# Altium PCB 中板20201119.PCBDOC
Units mm, origin at the board's own origin, x right, y up, seen from the top; angles counter-clockwise.
Board outline 146 x 56 mm, 2 copper layers (Top Layer, Bottom Layer); 4 components, 41 nets, 122 pads, 0 vias.
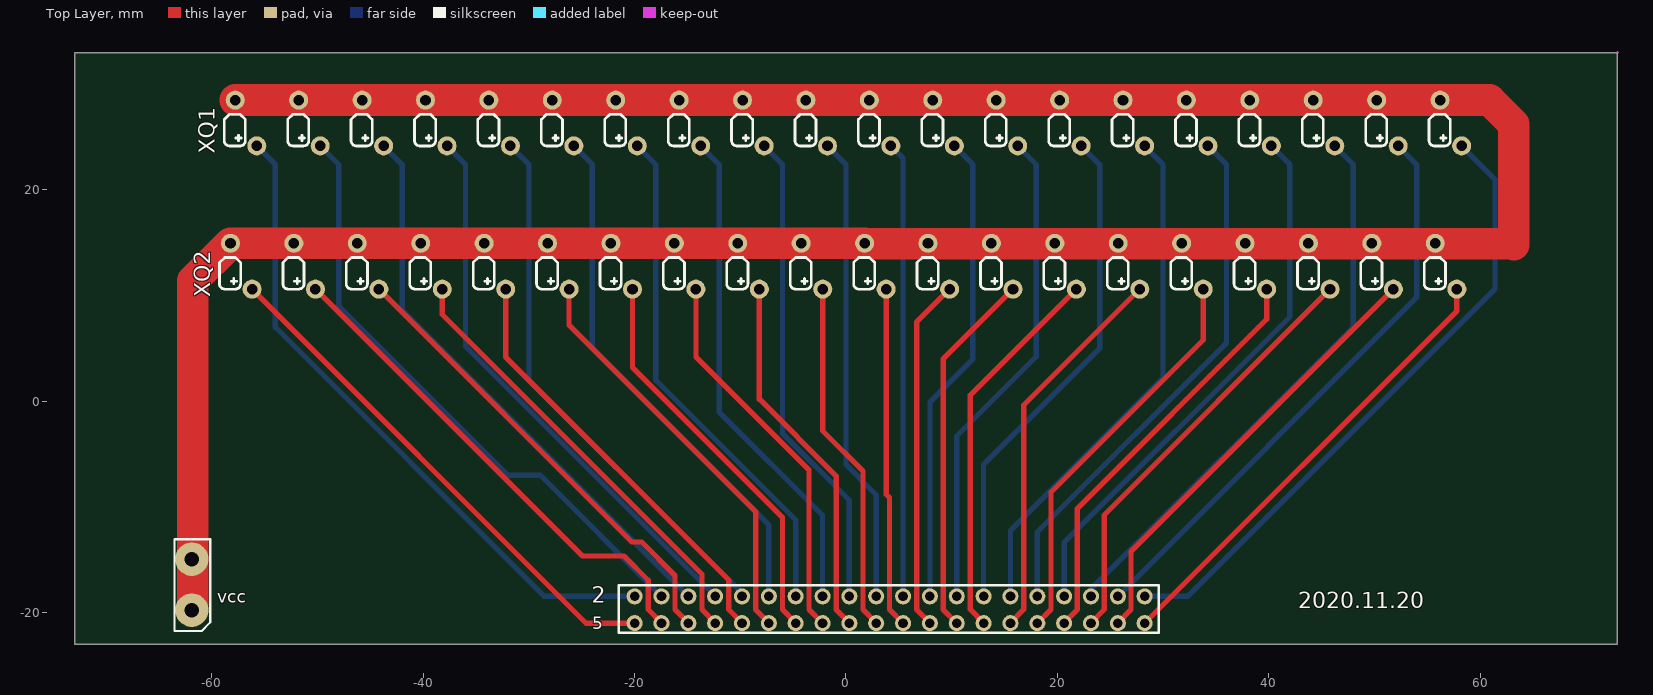
[diagram p0: Top Layer view]
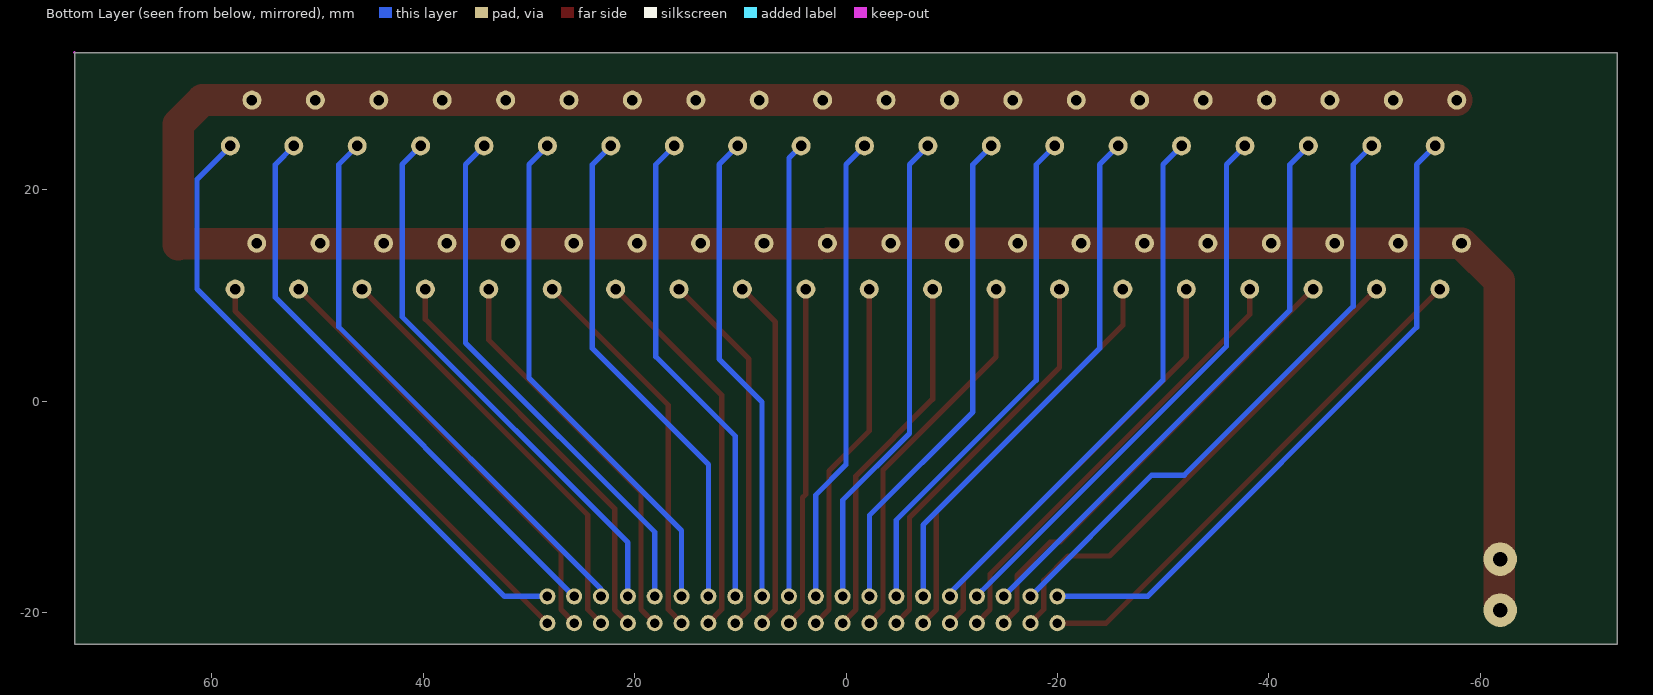
[diagram p1: Bottom Layer view, seen from below]

## Layer stack, top to bottom
Top Solder: solder mask 0.0102, Solder Resist, Dk 3.5
Top Layer: signal copper 0.0356
Dielectric1: dielectric 0.32, FR-4, Dk 4.8
Bottom Layer: signal copper 0.0356
Bottom Solder: solder mask 0.0102, Solder Resist, Dk 3.5

## Board outline
-73,-23 -73,32.975 73,32.975 73,33 73,-23

## Design rules (kind name [scope] priority, off if disabled: settings)
Clearance [All] p1: gap=0.3 ignorepadtopadclearanceinfootprint=FALSE except(0: Arc-Hole Track-Hole SMDPad-Hole THPad-Hole Via-Hole Fill-Hole Poly-Hole Region-Hole Text-Hole)
DiffPairsRouting [All] p1: maxlimit=0.254 minlimit=0.254 mostfreqgap=0.254 toplayer_minwidth=0.381 toplayer_maxwidth=4 toplayer_prefwidth=0.381 bottomlayer_minwidth=0.381 bottomlayer_maxwidth=4 bottomlayer_prefwidth=0.381 maxuncoupledlength=12.7
FabricationTestPointUsage TestPointUsage [All] p1: valid=0 allowmultiple=FALSE
FabricationTestpoint Testpoint [All] p1: side=3 testpointundercomponent=TRUE minsize=1.016 maxsize=2.54 preferedsize=1.524 minholesize=0 maxholesize=1.016 preferedholesize=0.813 testpointgrid=0.025 allowsidetop=TRUE allowsidebottom=TRUE usegrid=TRUE gridtolerance=0
PolygonConnect [All] p1: connectstyle=Relief reliefconductorwidth=0.254 reliefentries=4 polygonreliefangle="90 Angle" airgapwidth=0.254
RoutingVias [All] p1: holewidth=0.8 width=1.6 viastyle="Through Hole" minholewidth=0.711 minwidth=1.27 maxholewidth=0.711 maxwidth=1.27
SilkToSolderMaskClearance SilkscreenOverComponentPads [IsPad] p1: minsilkscreentomaskgap=0.254 clearancetoexposedcopper=TRUE
SolderMaskExpansion [All] p1: expansion=0.102
Width [All] p1: maxlimit=2.54 minlimit=0.254 preferedwidth=0.381
26 further rules are at their usual default settings.

## Classes and differential pairs
component class 盲文原理图1: 2 XQ1 XQ2

## Components (designator, comment, footprint, x,y, rotation, side; value= is the part's Value field where it differs from the comment)
2 "Header 21X2" XinPian -20,-21 r180 top (schematic designator 1)
XQ1 "Header 20X2" XIANQUAN1 58.25,24.16 r180 top
XQ2 "Header 20X2" XIANQUAN1 57.799,10.61 r180 top
? "" N1A -61.904,-14.939 r180 top

## Footprints (in the part's own frame and the unit in brackets; to place one, negate y for a bottom-side part, rotate by r counter-clockwise, add the part's x,y. Pads: shape width x height; smd on the part's side, far side on the other; paste and mask are expansions set on the pad)
N1A [mil]
  round 125 hole 55: 1(0,0) 2(0,190)
  silkscreen extent -69,-74 65,268
XIANQUAN1 [mm]
  round 1.8 hole 1: 1(2.04,-4.34) 2(0,0) 3(8.04,-4.34) 4(6,0) 5(14.04,-4.34) 6(12,0) 7(20.04,-4.34) 8(18,0) 9(26.04,-4.34) 10(24,0) 11(32.04,-4.34) 12(30,0) 13(38.04,-4.34) 14(36,0) 15(44.04,-4.34) 16(42,0) 17(50.04,-4.34) 18(48,0) 19(56.04,-4.34) 20(54,0) 21(62.04,-4.34) 22(60,0) 23(68.04,-4.34) 24(66,0) 25(74.04,-4.34) 26(72,0) 27(80.04,-4.34) 28(78,0) 29(86.04,-4.34) 30(84,0) 31(92.04,-4.34) 32(90,0) 33(98.04,-4.34) 34(96,0) 35(104.04,-4.34) 36(102,0) 37(110.04,-4.34) 38(108,0) 39(116.04,-4.34) 40(114,0)
  silkscreen extent 1.08,-3 117.08,0
XinPian [mil]
  round 60 hole 36: 1(0,-100) 2(-100,-100) 3(-200,-100) 4(-300,-100) 5(-400,-100) 6(-500,-100) 7(-600,-100) 8(-700,-100) 9(-800,-100) 10(-900,-100) 11(-1000,-100) 12(-1100,-100) 13(-1200,-100) 14(-1300,-100) 15(-1400,-100) 16(-1500,-100) 17(-1600,-100) 18(-1700,-100) 19(-1800,-100) 20(-1900,-100) 21(-1900,0) 22(-1800,0) 23(-1700,0) 24(-1600,0) 25(-1500,0) 26(-1400,0) 27(-1300,0) 28(-1200,0) 29(-1100,0) 30(-1000,0) 31(-900,0) 32(-800,0) 33(-700,0) 34(-600,0) 35(-500,0) 36(-400,0) 37(-300,0) 38(-200,0) 39(-100,0) 40(0,0)
  silkscreen extent -1953,-142 59,35

## Part data
2: library part "Header 22X2", "Header, 22-Pin, Dual row"
XQ1 XQ2: "Header, 20-Pin, Dual row"

## Nets (pads, with @x,y where several pads share a name; then routed paths per layer and width w, separated by ;. In a path a pad name is that pad's centre, name@x,y a point inside that pad or via, vN(x,y) a via of type N, cw(c..) or ccw(c..) an arc to the next point about the centre after c; other vN are vias at no path point)
GND: ?.1 ?.2 XQ1.1 XQ1.3 XQ1.5 XQ1.7 XQ1.9 XQ1.11 XQ1.13 XQ1.15 XQ1.17 XQ1.19 XQ1.21 XQ1.23 XQ1.25 XQ1.27 XQ1.29 XQ1.31 XQ1.33 XQ1.35 XQ1.37 XQ1.39 XQ2.1 XQ2.3 XQ2.5 XQ2.7 XQ2.9 XQ2.11 XQ2.13 XQ2.15 XQ2.17 XQ2.19 XQ2.21 XQ2.23 XQ2.25 XQ2.27 XQ2.29 XQ2.31 XQ2.33 XQ2.35 XQ2.37 XQ2.39 | length 291.3
  Top Layer w1.27: ?.2@-61.935,-19.25 -61.8,-19.115 ?.2@-61.75,-19.065
  Top Layer w1.524: 63.095,14.9 63.195,14.8
  Top Layer w2.54: ?.2 -61.8,-19.66 ?.2@-61.8,-19.115 ; XQ2.19 2.402,14.95 XQ2.19@2.452,14.9
  Top Layer w3: ?.2@-61.8,-19.115 -61.8,11.391 XQ2.39 XQ2.37 XQ2.35 XQ2.33 XQ2.31 XQ2.29 XQ2.27 XQ2.25 XQ2.23 XQ2.21 XQ2.19 ; XQ1.39 60.895,28.5 63.195,26.2 63.195,14.8 ; XQ2.19@2.452,14.9 37.759,14.9 63.095,14.9
XQ1_1: 2.20 XQ1.2 | length 60
  Bottom Layer w0.5: 2.20 32.315,-18.46 61.41,10.635 61.41,21 XQ1.2
XQ1_2: 2.19 XQ1.4 | length 55.1
  Bottom Layer w0.5: 2.19 54,9.82 54,22.41 XQ1.4
XQ1_3: 2.18 XQ1.6 | length 53.6
  Bottom Layer w0.381: 2.18 2.18@23.18,-17.77
  Bottom Layer w0.5: 2.18@23.18,-17.77 48,7.05 48,22.41 XQ1.6
XQ1_4: 2.17 XQ1.8 | length 52.2
  Bottom Layer w0.5: 2.17 20.64,-13.36 42,8 42,22.41 XQ1.8
XQ1_5: 2.16 XQ1.10 | length 50.8
  Bottom Layer w0.5: 2.16 18.1,-12.375 36,5.525 36,22.41 XQ1.10
XQ1_6: 2.15 XQ1.12 | length 49.3
  Bottom Layer w0.5: 2.15 15.56,-12.24 30,2.2 30,22.41 XQ1.12
XQ1_7: 2.14 XQ1.14 | length 47.9
  Bottom Layer w0.5: 2.14 13.02,-5.98 24,5 24,22.41 XQ1.14
XQ1_8: 2.13 XQ1.16 | length 46.5
  Bottom Layer w0.5: 2.13 10.48,-3.295 18,4.225 18,22.41 XQ1.16
XQ1_9: 2.12 XQ1.18 | length 45
  Bottom Layer w0.5: 2.12 7.94,-0.06 12,4 12,22.41 XQ1.18
XQ1_10: 2.11 XQ1.20 | length 43.1
  Bottom Layer w0.5: XQ1.20 5.4,23.01 2.11
XQ1_11: 2.10 XQ1.22 | length 44.5
  Bottom Layer w0.5: XQ1.22 0,22.41 0,-6 2.86,-8.86 2.10
XQ1_12: 2.9 XQ1.24 | length 46
  Bottom Layer w0.5: XQ1.24 -6,22.41 -6,-3.05 0.32,-9.37 2.9
XQ1_13: 2.8 XQ1.26 | length 47.4
  Bottom Layer w0.5: XQ1.26 -12,22.41 -12,-1 -2.22,-10.78 2.8
XQ1_14: 2.7 XQ1.28 | length 48.8
  Bottom Layer w0.5: XQ1.28 -18,22.41 -18,2 -4.76,-11.24 2.7
XQ1_15: 2.6 XQ1.30 | length 50.3
  Bottom Layer w0.5: XQ1.30 -24,22.41 -24,5 -7.3,-11.7 2.6
XQ1_16: 2.5 XQ1.32 | length 51.7
  Bottom Layer w0.381: 2.5 2.5@-9.84,-18.16
  Bottom Layer w0.5: XQ1.32 -30,22.41 -30,2 2.5@-9.84,-18.16
XQ1_17: 2.4 XQ1.34 | length 53.3
  Bottom Layer w0.381: 2.4@-12.85,-17.941 -12.85,-18.333 -12.722,-18.46 2.4
  Bottom Layer w0.5: XQ1.34 -36,22.41 -36,5.209 2.4@-12.85,-17.941
XQ1_18: 2.3 XQ1.36 | length 54.6
  Bottom Layer w0.5: XQ1.36 -42,22.41 -42,8.62 2.3
XQ1_19: 2.2 XQ1.38 | length 57.8
  Bottom Layer w0.5: XQ1.38 -48,22.41 -48,9 -32,-7 -28.92,-7 2.2
XQ1_20: 2.1 XQ1.40 | length 62.4
  Bottom Layer w0.5: XQ1.40 -54,22.41 -54,7 -28.54,-18.46 2.1
XQ2_1: 2.21 XQ2.2 | length 43.8
  Top Layer w0.5: 2.21 57.799,8.539 XQ2.2
XQ2_2: 2.22 XQ2.4 | length 42.4
  Top Layer w0.381: 2.22 2.22@25.72,-20.965
  Top Layer w0.5: 2.22@25.72,-20.965 26.972,-19.713 26.972,-14.217 XQ2.4
XQ2_3: 2.23 XQ2.6 | length 41
  Top Layer w0.381: 2.23 2.23@23.18,-20.965
  Top Layer w0.5: 2.23@23.18,-20.965 24.432,-19.713 24.432,-10.757 XQ2.6
XQ2_4: 2.24 XQ2.8 | length 39.5
  Top Layer w0.381: 2.24 2.24@20.64,-20.965
  Top Layer w0.5: 2.24@20.64,-20.965 21.892,-19.713 21.892,-10.15 39.799,7.757 XQ2.8
XQ2_5: 2.25 XQ2.10 | length 38.1
  Top Layer w0.5: 2.25 19.387,-19.713 19.387,-8.612 33.799,5.799 XQ2.10
XQ2_6: 2.26 XQ2.12 | length 36.7
  Top Layer w0.381: 2.26 2.26@15.56,-20.965
  Top Layer w0.5: 2.26@15.56,-20.965 16.812,-19.713 16.812,-0.377 XQ2.12
XQ2_7: 2.27 XQ2.14 | length 36.3
  Top Layer w0.381: 2.27 2.27@13.02,-20.965
  Top Layer w0.5: 2.27@13.02,-20.965 11.767,-19.713 11.767,0.578 XQ2.14
XQ2_8: 2.28 XQ2.16 | length 34.9
  Top Layer w0.5: 2.28 9.192,-19.713 9.192,4.003 XQ2.16
XQ2_9: 2.29 XQ2.18 | length 33.4
  Top Layer w0.381: 2.29 2.29@7.94,-20.965
  Top Layer w0.5: 2.29@7.94,-20.965 6.687,-19.713 6.687,7.498 XQ2.18
XQ2_10: 2.30 XQ2.20 | length 32.3
  Top Layer w0.5: XQ2.20 3.799,-8.799 4.112,-9.112 4.112,-19.713 2.30
XQ2_11: 2.31 XQ2.22 | length 33.7
  Top Layer w0.381: 2.31 2.31@2.86,-20.965
  Top Layer w0.5: XQ2.22 -2.201,-2.799 1.607,-6.608 1.607,-19.713 2.31@2.86,-20.965
XQ2_12: 2.32 XQ2.24 | length 35.1
  Top Layer w0.381: 2.32 2.32@0.32,-20.965
  Top Layer w0.5: XQ2.24 -8.201,0.201 -0.933,-7.068 -0.933,-19.713 2.32@0.32,-20.965
XQ2_13: 2.33 XQ2.26 | length 36.6
  Top Layer w0.5: XQ2.26 -14.201,4.201 -3.508,-6.492 -3.508,-19.713 2.33
XQ2_14: 2.34 XQ2.28 | length 38
  Top Layer w0.381: 2.34 2.34@-4.76,-20.965
  Top Layer w0.5: XQ2.28 -20.201,3.201 -6.013,-10.988 -6.013,-19.713 2.34@-4.76,-20.965
XQ2_15: 2.35 XQ2.30 | length 39.4
  Top Layer w0.381: 2.35 2.35@-7.3,-20.965
  Top Layer w0.5: XQ2.30 -26.201,7.201 -8.553,-10.448 -8.553,-19.713 2.35@-7.3,-20.965
XQ2_16: 2.36 XQ2.32 | length 40.9
  Top Layer w0.381: 2.36 2.36@-9.84,-20.965
  Top Layer w0.5: XQ2.32 -32.201,4.201 -11.093,-16.907 -11.093,-19.713 2.36@-9.84,-20.965
XQ2_17: 2.37 XQ2.34 | length 42.3
  Top Layer w0.381: 2.37 2.37@-12.38,-20.965
  Top Layer w0.5: XQ2.34 -38.201,8.201 -13.633,-16.368 -13.633,-19.713 2.37@-12.38,-20.965
XQ2_18: 2.38 XQ2.36 | length 44.3
  Top Layer w0.381: 2.38 2.38@-14.92,-20.965
  Top Layer w0.5: XQ2.36 -20.272,-13.319 -19.331,-13.319 -16.173,-16.477 -16.173,-19.713 2.38@-14.92,-20.965
XQ2_19: 2.39 XQ2.38 | length 47.5
  Top Layer w0.381: 2.39 2.39@-17.46,-20.965
  Top Layer w0.5: XQ2.38 -24.941,-14.65 -21,-14.65 -18.713,-16.937 -18.713,-19.713 2.39@-17.46,-20.965
XQ2_20: 2.40 XQ2.40 | length 49.3
  Top Layer w0.5: XQ2.40 -24.591,-21 2.40

## Keep-outs
Keep-Out Layer:
  lines w0.254: 73,33 73,33

## Silkscreen, mask and mechanical layers (free items; w line width, h text height)
Top Overlay:
  text "vcc" at -59.475,-19.475 h2.02
  text "2020.11.20" at 42.8,-19.6 h1.52
  text "5" at -24,-22 h2.02
Mechanical 1:
  circle w0.254: c24,0 r1.5
  circle w0.254: c-24,0 r1.5
  circle w0.254: c67.5,25 r1.5
  circle w0.254: c67.5,19.5 r1.5
  circle w0.254: c67.5,14 r1.5
  circle w0.254: c-67.5,14 r1.5
  circle w0.254: c-67.5,19.5 r1.5
  circle w0.254: c-67.5,25 r1.5
  circle w0.01: c-55.75,19.5 r0.5
  circle w0.01: c-55.75,17 r0.65
  circle w0.01: c-49.75,19.5 r0.5
  circle w0.01: c-49.75,17 r0.65
  circle w0.01: c-52.25,19.5 r0.5
  circle w0.01: c-52.25,22 r0.65
  circle w0.01: c-43.75,19.5 r0.5
  circle w0.01: c-43.75,17 r0.65
  circle w0.01: c-46.25,19.5 r0.5
  circle w0.01: c-46.25,22 r0.65
  circle w0.01: c-37.75,19.5 r0.5
  circle w0.01: c-37.75,17 r0.65
  circle w0.01: c-40.25,19.5 r0.5
  circle w0.01: c-40.25,22 r0.65
  circle w0.01: c-31.75,19.5 r0.5
  circle w0.01: c-31.75,17 r0.65
  circle w0.01: c-34.25,19.5 r0.5
  circle w0.01: c-34.25,22 r0.65
  circle w0.01: c-25.75,19.5 r0.5
  circle w0.01: c-25.75,17 r0.65
  circle w0.01: c-28.25,19.5 r0.5
  circle w0.01: c-28.25,22 r0.65
  circle w0.01: c-19.75,19.5 r0.5
  circle w0.01: c-19.75,17 r0.65
  circle w0.01: c-22.25,19.5 r0.5
  circle w0.01: c-22.25,22 r0.65
  circle w0.01: c-13.75,19.5 r0.5
  circle w0.01: c-13.75,17 r0.65
  circle w0.01: c-16.25,19.5 r0.5
  circle w0.01: c-16.25,22 r0.65
  circle w0.01: c-7.75,19.5 r0.5
  circle w0.01: c-7.75,17 r0.65
  circle w0.01: c-10.25,19.5 r0.5
  circle w0.01: c-10.25,22 r0.65
  circle w0.01: c58.25,19.5 r0.5
  circle w0.01: c58.25,17 r0.65
  circle w0.01: c55.75,19.5 r0.5
  circle w0.01: c55.75,22 r0.65
  circle w0.01: c52.25,19.5 r0.5
  circle w0.01: c52.25,17 r0.65
  circle w0.01: c49.75,19.5 r0.5
  circle w0.01: c49.75,22 r0.65
  circle w0.01: c46.25,19.5 r0.5
  circle w0.01: c46.25,17 r0.65
  circle w0.01: c43.75,19.5 r0.5
  circle w0.01: c43.75,22 r0.65
  circle w0.01: c40.25,19.5 r0.5
  circle w0.01: c40.25,17 r0.65
  circle w0.01: c37.75,19.5 r0.5
  circle w0.01: c37.75,22 r0.65
  circle w0.01: c34.25,19.5 r0.5
  circle w0.01: c34.25,17 r0.65
  circle w0.01: c31.75,19.5 r0.5
  circle w0.01: c31.75,22 r0.65
  circle w0.01: c28.25,19.5 r0.5
  circle w0.01: c28.25,17 r0.65
  circle w0.01: c25.75,19.5 r0.5
  circle w0.01: c25.75,22 r0.65
  circle w0.01: c22.25,19.5 r0.5
  circle w0.01: c22.25,17 r0.65
  circle w0.01: c19.75,19.5 r0.5
  circle w0.01: c19.75,22 r0.65
  circle w0.01: c16.25,19.5 r0.5
  circle w0.01: c16.25,17 r0.65
  circle w0.01: c13.75,19.5 r0.5
  circle w0.01: c13.75,22 r0.65
  circle w0.01: c10.25,19.5 r0.5
  circle w0.01: c10.25,17 r0.65
  circle w0.01: c7.75,19.5 r0.5
  circle w0.01: c7.75,22 r0.65
  circle w0.01: c4.25,19.5 r0.5
  circle w0.01: c4.25,17 r0.65
  circle w0.01: c1.75,19.5 r0.5
  circle w0.01: c1.75,22 r0.65
  circle w0.01: c-4.25,22 r0.65
  circle w0.01: c-4.25,19.5 r0.5
  circle w0.01: c-1.75,17 r0.65
  circle w0.01: c-1.75,19.5 r0.5
  circle w0.01: c-58.25,19.5 r0.5
  circle w0.01: c-58.25,22 r0.65
  lines w0.508: -73,32.975 73,32.975 ; -73,33 -73,-23 73,-23 ; 72.975,32.975 73,33 73,-23 ; 73,-23 73,-23
Mechanical 13:
  lines w0.254: -73,-23 73,-23